# Altium PCB CC2640R2F_Bluetooth_Beacon.PcbDoc
Units mm, origin at the board's own origin, x right, y up, seen from the top; angles counter-clockwise.
Board outline 50 x 60 mm, 2 copper layers (Top Layer, Bottom Layer), stack 0.67 mm thick; 33 components, 52 nets, 149 pads, 148 vias.
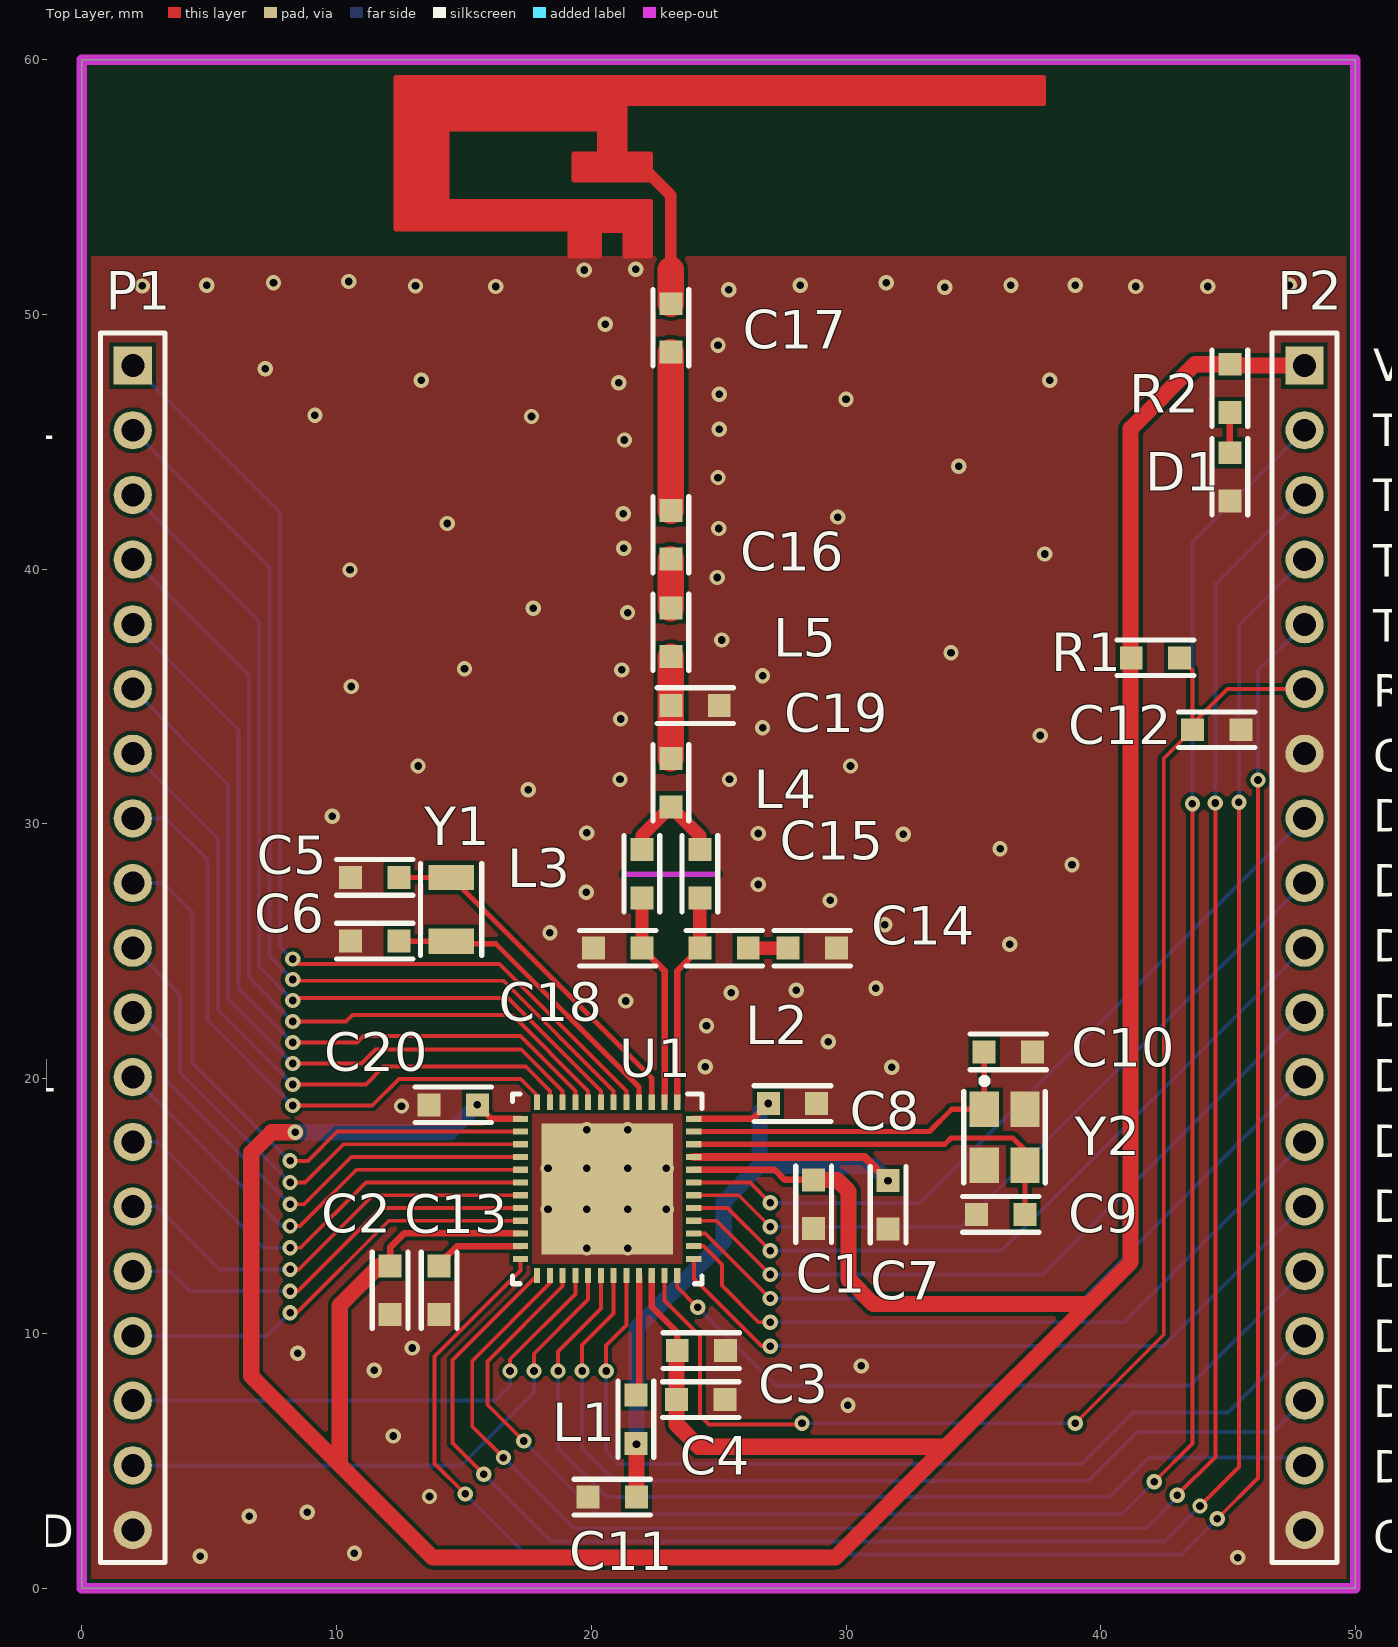
[diagram p0: Top Layer view]
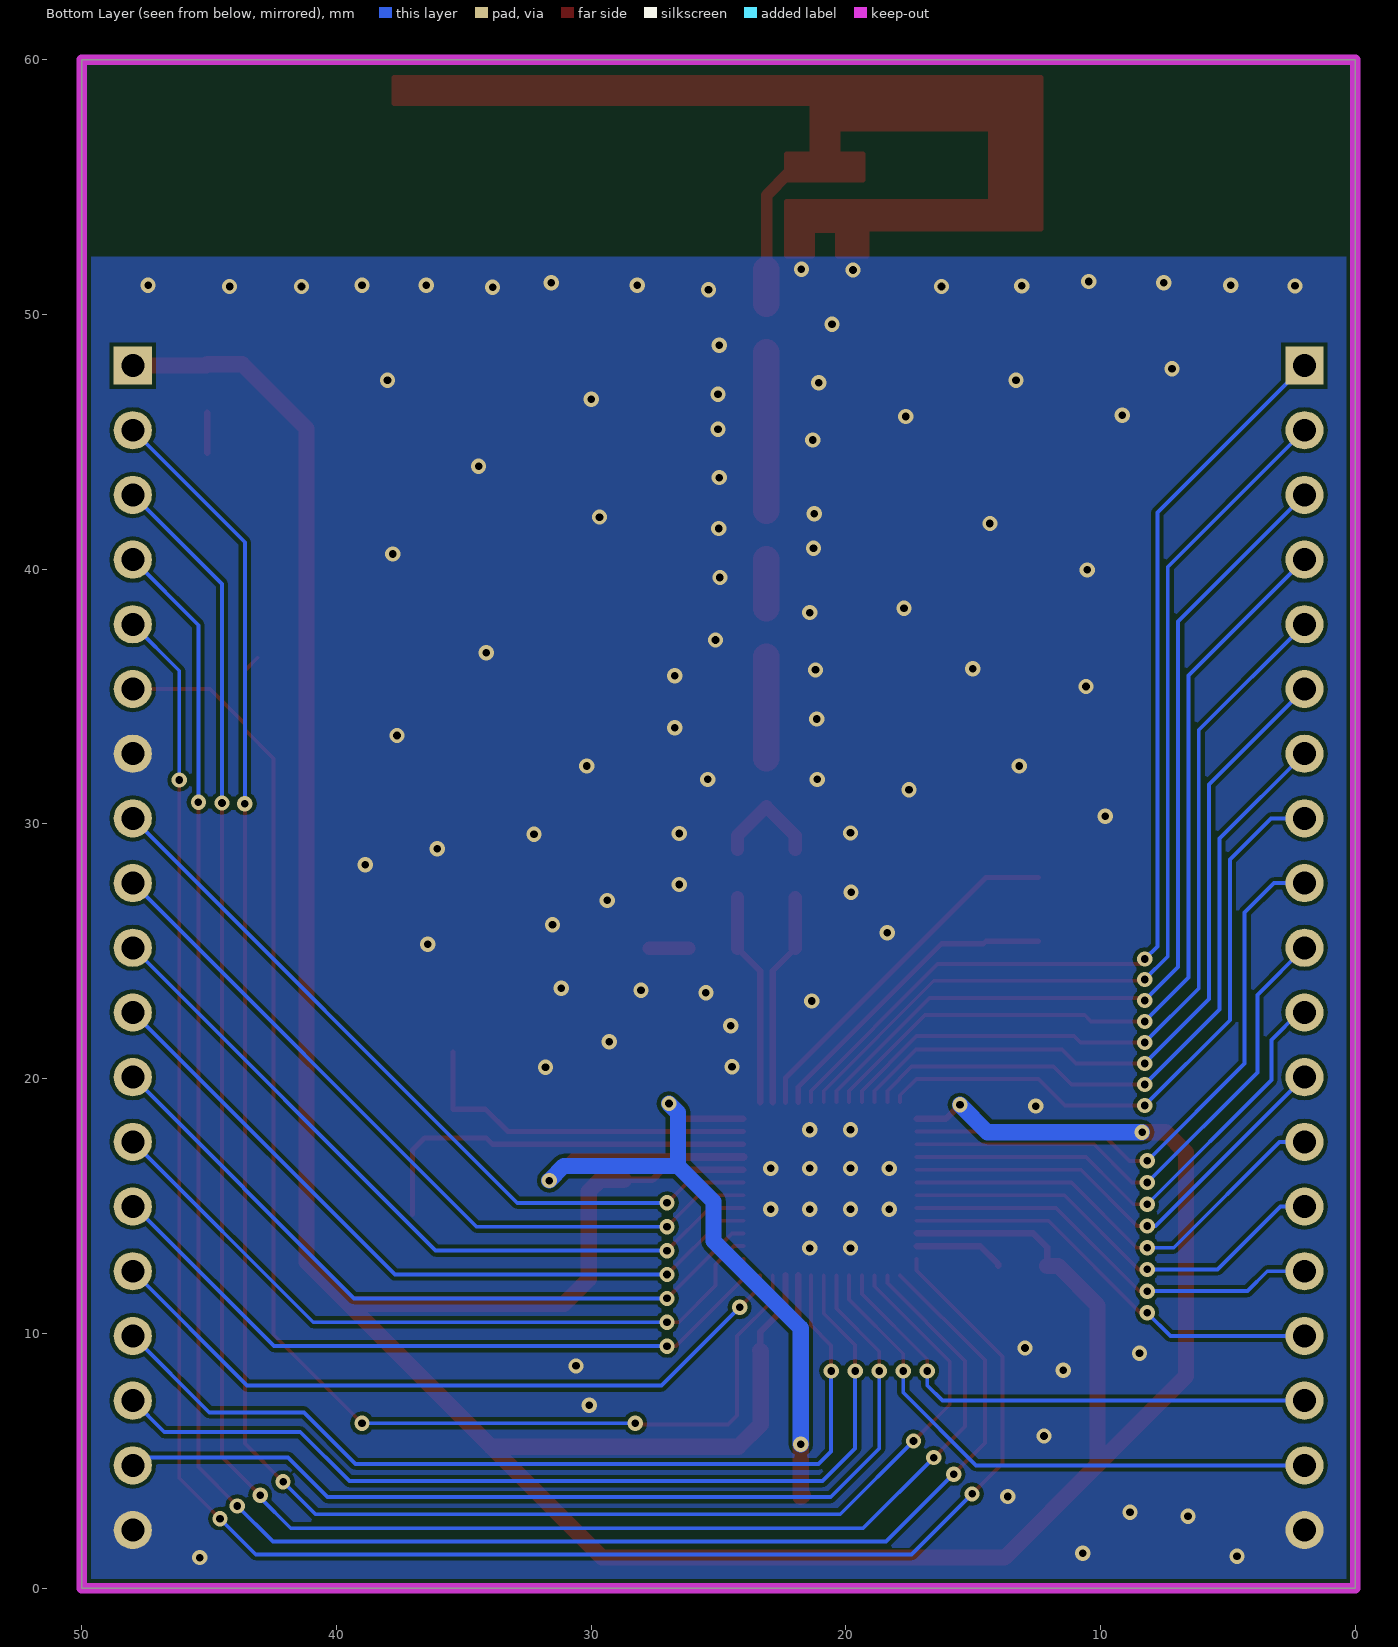
[diagram p1: Bottom Layer view, seen from below]

## Layer stack, top to bottom
Top Solder: solder mask 0.01, Solder Resist, Dk 3.5
Top Layer: signal copper 0.035
Dielectric 1: core 0.6, FR-4, Dk 4.2
Bottom Layer: signal copper 0.035
Bottom Solder: solder mask 0.01, Solder Resist, Dk 3.5

## Board outline
0,0 0,60 50,60 50,0

## Design rules (kind name [scope] priority, off if disabled: settings)
Clearance [All] p1: gap=0.152 ignorepadtopadclearanceinfootprint=FALSE
HoleSize [All] p1: absolutevalues=TRUE maxlimit=2.54 minlimit=0.3 maxpercent=80.000 minpercent=20.000
MaxMinImpedance [InNet('ANT')] p1: minimum=50,00 maximum=50,00
PlaneConnect [All] p1: planeconnectstyle=Direct reliefexpansion=0.508 reliefentries=4 reliefconductorwidth=0.254 reliefairgap=0.254
PolygonConnect [All] p1: connectstyle=Direct reliefconductorwidth=0.254 reliefentries=4 polygonreliefangle="90 Angle" airgapwidth=0.254
RoomDefinition CC2640R2F_Bluetooth_Beacon [InComponentClass('CC2640R2F_Bluetooth_Beacon')] p1: confinementstyle=ConfineIn formatcopy=TRUE lockcomponents=FALSE outline -81.255,-62.513 -30.455,-62.513 -30.455,-37.113 -81.255,-37.113
RoutingVias [All] p1: holewidth=0.3 width=0.6 viastyle="Through Hole" minholewidth=0.3 minwidth=0.6 maxholewidth=0.711 maxwidth=1.27
SolderMaskExpansion [All] p1: expansion=0.102
UnRoutedNet [All] p1: checkbadconnections=TRUE
Width [All] p1: maxlimit=1.27 minlimit=0.152 preferedwidth=0.203
27 further rules are at their usual default settings.

## Components (designator, comment, footprint, x,y, rotation, side; value= is the part's Value field where it differs from the comment)
C1 "Cap" 0603 28.725,15.075 r90 top value=100nF
C2 "Cap" 0603 12.1,11.7 r90 top value=100nF
C3 "Cap" 0603 24.325,9.325 r180 top value=100nF
C4 "Cap" 0603 24.3,7.4 r180 top value=10uF
C5 "Cap" 0603 11.5,27.9 r0 top value=12pF
C6 "Cap" 0603 11.5,25.4 r0 top value=12pF
C7 "Cap" 0603 31.65,15.05 r90 top value=100nF
C8 "Cap" 0603 27.9,19.025 r180 top value=100nF
C9 "DNA" 0603 36.075,14.675 r0 top value=12pF
C10 "DNA" 0603 36.375,21.05 r180 top value=12pF
C11 "Cap" 0603 20.825,3.575 r0 top value=10uF
C12 "Cap" 0603 44.55,33.7 r180 top value=100nF
C13 "Cap" 0603 14.025,11.7 r90 top value=1uF
C14 "Cap" 0603 28.675,25.125 r180 top value=6.8pF
C15 "Cap" 0603 24.263,28.05 r270 top value=1pF
C16 "Cap" 0603 23.125,41.35 r270 top value=12pF
C17 "Cap" 0603 23.125,49.475 r270 top value=1.8pF
C18 "Cap" 0603 21.038,25.125 r0 top value=1pF
C19 "Cap" 0603 24.075,34.65 r180 top value=1pF
C20 "Cap" 0603 14.575,18.975 r0 top value=100nF
D1 "LED" 0603 45.075,43.625 r270 top
L1 "DNA" 0603 21.75,6.625 r90 top value=10uH
L2 "Inductor" 0603 25.213,25.125 r0 top value=2.4nH
L3 "Inductor" 0603 21.988,28.05 r270 top value=2.4nH
L4 "Inductor" 0603 23.125,31.625 r270 top value=2nH
L5 "Inductor" 0603 23.125,37.525 r270 top value=2nH
P1 "Header 19x1" HDR1X19 2,48 r270 top
P2 "Header 19x1" HDR1X19 48,48 r270 top
R1 "Res" 0603 42.15,36.525 r180 top value=100K
R2 "Res" 0603 45.075,47.1 r90 top value=220R
U1 "CC2610R2FFRGZR" VQFN-48 20.625,15.675 r270 top
Y1 "XTAL" FC-135 14.5,26.65 r270 top
Y2 "XTAL-2" TX-3225 36.225,17.7 r270 top

## Footprints (in the part's own frame and the unit in brackets; to place one, negate y for a bottom-side part, rotate by r counter-clockwise, add the part's x,y. Pads: shape width x height; smd on the part's side, far side on the other; paste and mask are expansions set on the pad)
0603 [mm]
  rect 0.9x0.9 smd: 1(-0.95,0) 2(0.95,0)
  silkscreen extent -1.5,-0.7 1.5,0.7, body extent -0.8,-0.4 0.8,0.4, height 0.45
FC-135 [mm]
  rect 1x1.8 smd: 1(-1.25,0) 2(1.25,0)
  silkscreen extent -1.8,-1.2 1.8,1.2, body extent -1.6,-0.75 1.6,0.75, height 0.8
HDR1X19 [mm] "Connector; Header; 19 Position"
  rect 1.5x1.5 hole 0.9: 1(0,0)
  round 1.5 hole 0.9: 2(2.54,0) 3(5.08,0) 4(7.62,0) 5(10.16,0) 6(12.7,0) 7(15.24,0) 8(17.78,0) 9(20.32,0) 10(22.86,0) 11(25.4,0) 12(27.94,0) 13(30.48,0) 14(33.02,0) 15(35.56,0) 16(38.1,0) 17(40.64,0) 18(43.18,0) 19(45.72,0)
  silkscreen extent -1.27,-1.27 46.99,1.27
TX-3225 [mm]
  rect 1.4x1.15 smd: 1(-1.1,-0.8) 2(1.1,-0.8) 3(1.1,0.8) 4(-1.1,0.8)
  silkscreen extent -2.32,-1.6 1.8,1.6, body extent -1.6,-1.25 1.6,1.25, height 0.6
VQFN-48 [mm]
  rect 0.6x0.24 smd paste+0 mask+0.051: 1(-3.4,2.75) 2(-3.4,2.25) 3(-3.4,1.75) 4(-3.4,1.25) 5(-3.4,0.75) 6(-3.4,0.25) 7(-3.4,-0.25) 8(-3.4,-0.75) 9(-3.4,-1.25) 10(-3.4,-1.75) 11(-3.4,-2.25) 12(-3.4,-2.75) 25(3.4,-2.75) 26(3.4,-2.25) 27(3.4,-1.75) 28(3.4,-1.25) 29(3.4,-0.75) 30(3.4,-0.25) 31(3.4,0.25) 32(3.4,0.75) 33(3.4,1.25) 34(3.4,1.75) 35(3.4,2.25) 36(3.4,2.75)
  rect 0.24x0.6 smd paste+0 mask+0.051: 13(-2.75,-3.4) 14(-2.25,-3.4) 15(-1.75,-3.4) 16(-1.25,-3.4) 17(-0.75,-3.4) 18(-0.25,-3.4) 19(0.25,-3.4) 20(0.75,-3.4) 21(1.25,-3.4) 22(1.75,-3.4) 23(2.25,-3.4) 24(2.75,-3.4) 37(2.75,3.4) 38(2.25,3.4) 39(1.75,3.4) 40(1.25,3.4) 41(0.75,3.4) 42(0.25,3.4) 43(-0.25,3.4) 44(-0.75,3.4) 45(-1.25,3.4) 46(-1.75,3.4) 47(-2.25,3.4) 48(-2.75,3.4)
  rect 5.15x5.15 smd paste-2.562 mask+0.051: 49(0,0)
  silkscreen extent -3.72,-3.72 3.72,3.72, body extent -3.51,-3.5 3.49,3.5, height 1

## Part data
C1 C2 C3 C7 C8 C12 C20: "Capacitor", MPN=VJ0603Y104JXQPW1BC
C4 C11: "Capacitor", MPN=GRM188C80G106KE47J
C5 C6 C16: "Capacitor", MPN=VJ0603A120KXQPW1BC
C9 C10: library part Cap, "Capacitor", MPN=VJ0603A120KXQPW1BC
C13: "Capacitor", MPN=CGA3E1X7R1C105K080AC
C14: "Capacitor", MPN=885012006031
C15 C18 C19: "Capacitor", MPN=885012006045
C17: "Capacitor", MPN=VJ0603A1R8BXXCW1BC
D1: "Typical RED GaAs LED", MPN=150060VS55040
L1: library part Inductor, "Inductor", MPN=MLZ1608E100MT
L2 L3: MPN=LQW18AN2N4C80D
L4 L5: MPN=LQG15HZ2N0S02D
P1 P2: "Header, 19-Pin", LatestRevisionDate=17-Jul-2002, LatestRevisionNote="Re-released for DXP Platform.", Publisher="Altium Limited"
R1: "Resistor", MPN=RC0603JR-07100KL
R2: "Resistor", MPN=RC0603JR-13220RL
U1: library part CC2640R2FRGZR, "CC2640R2F SimpleLink™ Bluetooth® low energy Wireless MCU", MPN=CC2640R2FRGZR
Y1: "Crystal Oscillator", MPN="FC-135 32.7680KA-AG0"
Y2: "Crystal Oscillator", Manufacturer PartNo 1="TSX-3225 24.0000MF15X-AC3"

## Via types
v1: diameter 0.6, hole 0.3, Top Layer to Bottom Layer, 148 vias

## Nets (pads, with @x,y where several pads share a name; then routed paths per layer and width w, separated by ;. In a path a pad name is that pad's centre, name@x,y a point inside that pad or via, vN(x,y) a via of type N, cw(c..) or ccw(c..) an arc to the next point about the centre after c; other vN are vias at no path point)
ANT: C17.1 | length 1.3
  Top Layer w1.041: C17.1 23.125,51.768
DCDC_SW: L1.2 U1.33 | length 4.9
  Top Layer w0.254: L1.2@21.7,7.4 21.875,7.575 U1.33
DIO_0: P1.1 U1.5 | length 41.6
  Top Layer w0.152: v1(8.275,24.698) 8.475,24.498 16.402,24.498 21.375,19.525 U1.5
  Bottom Layer w0.152: P1.1 7.775,42.225 7.775,25.198 v1(8.275,24.698)
DIO_1: P1.2 U1.6 | length 39
  Top Layer w0.152: v1(8.275,23.896) 8.325,23.846 16.554,23.846 20.875,19.525 U1.6
  Bottom Layer w0.152: P1.2 7.369,40.091 7.369,24.802 v1(8.275,23.896)
DIO_2: P1.3 U1.7 | length 36.5
  Top Layer w0.152: v1(8.275,23.071) 8.375,23.171 16.729,23.171 20.375,19.525 U1.7
  Bottom Layer w0.152: P1.3 6.962,37.958 6.962,24.384 v1(8.275,23.071)
DIO_3: P1.4 U1.8 | length 34.1
  Top Layer w0.152: v1(8.275,22.247) 10.375,22.247 10.625,22.497 16.903,22.497 19.875,19.525 U1.8
  Bottom Layer w0.152: P1.4 6.556,35.824 6.556,23.966 v1(8.275,22.247)
DIO_4: P1.5 U1.9 | length 31.6
  Top Layer w0.152: v1(8.275,21.423) 10.8,21.423 11.052,21.675 17.225,21.675 19.375,19.525 U1.9
  Bottom Layer w0.152: P1.5 6.149,33.691 6.149,23.548 v1(8.275,21.423)
DIO_5: P1.6 U1.10 | length 29.3
  Top Layer w0.152: v1(8.275,20.599) 10.974,20.599 11.524,21.149 17.251,21.149 18.875,19.525 U1.10
  Bottom Layer w0.152: P1.6 5.743,31.557 5.743,23.131 v1(8.275,20.599)
DIO_6: P1.7 U1.11 | length 26.8
  Top Layer w0.152: v1(8.275,19.774) 11.149,19.774 11.849,20.474 17.426,20.474 18.375,19.525 U1.11
  Bottom Layer w0.152: P1.7 5.337,29.423 5.337,22.713 v1(8.275,19.774)
DIO_7: P1.8 U1.12 | length 25.2
  Top Layer w0.152: v1(8.275,18.95) 11.4,18.95 12.446,19.996 17.229,19.996 17.875,19.35 U1.12
  Bottom Layer w0.152: P1.8 3.31,30.22 4.93,28.6 4.93,22.295 v1(8.275,18.95)
DIO_8: P1.9 U1.14 | length 23.7
  Top Layer w0.152: v1(8.175,16.775) 8.875,16.775 10.025,17.925 U1.14
  Bottom Layer w0.152: P1.9 3.195,27.68 4.35,26.525 4.35,20.6 v1(8.175,16.775)
DIO_9: P1.10 U1.15 | length 21.4
  Top Layer w0.152: v1(8.175,15.923) 8.768,15.923 10.27,17.425 U1.15
  Bottom Layer w0.152: P1.10 3.85,23.29 3.85,20.248 v1(8.175,15.923)
DIO_10: P1.11 U1.16 | length 20
  Top Layer w0.152: v1(8.175,15.07) 8.723,15.07 9.35,15.698 9.35,15.7 10.575,16.925 U1.16
  Bottom Layer w0.152: P1.11 2.225,22.6 3.3,21.525 3.3,19.945 v1(8.175,15.07)
DIO_11: P1.12 U1.17 | length 18.6
  Top Layer w0.152: v1(8.175,14.218) 8.568,14.218 10.775,16.425 U1.17
  Bottom Layer w0.152: P1.12 7.842,14.218 v1(8.175,14.218)
DIO_12: P1.13 U1.18 | length 18
  Top Layer w0.152: v1(8.175,13.365) 8.59,13.365 11.15,15.925 U1.18
  Bottom Layer w0.152: P1.13 2.98,17.52 7.135,13.365 v1(8.175,13.365)
DIO_13: P1.14 U1.19 | length 17.5
  Top Layer w0.152: v1(8.175,12.513) 8.513,12.513 11.425,15.425 U1.19
  Bottom Layer w0.152: P1.14 2.945,14.98 5.412,12.513 v1(8.175,12.513)
DIO_14: P1.15 U1.20 | length 16.9
  Top Layer w0.152: v1(8.175,11.661) 8.486,11.661 11.75,14.925 U1.20
  Bottom Layer w0.152: P1.15 3.46,12.44 4.239,11.661 v1(8.175,11.661)
DIO_15: P1.16 U1.21 | length 17.1
  Top Layer w0.152: v1(8.175,10.808) 8.433,10.808 12.05,14.425 U1.21
  Bottom Layer w0.152: P1.16 7.267,9.9 v1(8.175,10.808)
DIO_16/JTAG_TDO: P2.3 U1.26 | length 78.5
  Top Layer w0.152: v1(16.55,5.125) 15.325,6.35 15.325,8.925 18.375,11.975 U1.26 ; v1(43,3.65) 44.5,5.15 v1(44.5,30.825)
  Bottom Layer w0.152: v1(16.55,5.125) 19.325,2.35 41.798,2.35 43,3.552 v1(43,3.65) ; v1(44.5,30.825) 44.5,39.42 P2.3
DIO_17/JTAG_TDI: P2.2 U1.27 | length 78.5
  Top Layer w0.152: v1(17.35,5.775) 15.925,7.2 15.925,8.9 18.875,11.85 U1.27 ; v1(42.1,4.175) 43.6,5.675 v1(43.6,30.8)
  Bottom Layer w0.152: v1(17.35,5.775) 20.225,2.9 40.825,2.9 v1(42.1,4.175) ; v1(43.6,30.8) 43.6,41.06 P2.2
DIO_18: P1.17 U1.28 | length 20.4
  Top Layer w0.152: v1(16.811,8.525) 16.811,8.986 19.375,11.55 U1.28
  Bottom Layer w0.152: P1.17 16.21,7.36 16.811,7.961 v1(16.811,8.525)
DIO_19: P1.18 U1.29 | length 22.4
  Top Layer w0.152: v1(17.754,8.525) 17.754,9.204 19.875,11.325 U1.29
  Bottom Layer w0.152: P1.18 14.895,4.82 17.754,7.679 v1(17.754,8.525)
DIO_20: P2.18 U1.30 | length 38.4
  Top Layer w0.152: v1(18.696,8.525) 18.696,9.296 20.375,10.975 U1.30
  Bottom Layer w0.152: v1(18.696,8.525) 18.696,5.479 20.6,3.575 40.35,3.575 41.9,5.125 47.695,5.125 P2.18
DIO_21: P2.17 U1.31 | length 37.5
  Top Layer w0.152: v1(19.639,8.525) 19.639,9.539 20.875,10.775 U1.31
  Bottom Layer w0.152: v1(19.639,8.525) 19.639,5.486 20.925,4.2 39.5,4.2 41.425,6.125 46.765,6.125 P2.17
DIO_22: P2.16 U1.32 | length 36.9
  Top Layer w0.152: v1(20.582,8.525) 20.582,9.532 21.375,10.325 U1.32
  Bottom Layer w0.152: v1(20.582,8.525) 20.582,5.368 21.075,4.875 39.25,4.875 41.275,6.9 45,6.9 P2.16
DIO_23: P2.15 U1.36 | length 28.5
  Top Layer w0.152: U1.36 23.375,11.825 v1(24.175,11.025)
  Bottom Layer w0.152: v1(24.175,11.025) 27.25,7.95 43.51,7.95 P2.15
DIO_24: P2.14 U1.37 | length 28.1
  Top Layer w0.152: U1.37 24.025,12.15 26.675,9.5 v1(27.025,9.5)
  Bottom Layer w0.152: v1(27.025,9.5) 42.455,9.5 47.935,14.98 P2.14
DIO_25: P2.13 U1.38 | length 28.6
  Top Layer w0.152: U1.38 24.4,13.425 25.125,12.7 25.125,11.875 26.563,10.437 v1(27.025,10.437)
  Bottom Layer w0.152: v1(27.025,10.437) 40.917,10.437 P2.13
DIO_26: P2.12 U1.39 | length 28.6
  Top Layer w0.152: U1.39 24.475,13.925 v1(27.025,11.375)
  Bottom Layer w0.152: v1(27.025,11.375) 39.315,11.375 P2.12
DIO_27: P2.11 U1.40 | length 29.1
  Top Layer w0.152: U1.40 24.912,14.425 v1(27.025,12.312)
  Bottom Layer w0.152: v1(27.025,12.312) 37.712,12.312 P2.11
DIO_28: P2.10 U1.41 | length 29.6
  Top Layer w0.152: U1.41 25.35,14.925 v1(27.025,13.25)
  Bottom Layer w0.152: v1(27.025,13.25) 36.11,13.25 P2.10
DIO_29: P2.9 U1.42 | length 30.1
  Top Layer w0.152: U1.42 25.787,15.425 v1(27.025,14.188)
  Bottom Layer w0.152: v1(27.025,14.188) 34.508,14.188 P2.9
DIO_30: P2.8 U1.43 | length 30.6
  Top Layer w0.152: U1.43 26.225,15.925 v1(27.025,15.125)
  Bottom Layer w0.152: v1(27.025,15.125) 32.905,15.125 P2.8
GND: C1.1 C2.1 C3.1 C4.1 C5.1 C6.1 C7.1 C8.1 C9.1 C10.1 C11.1 C12.1 C13.1 C14.1 C18.1 C19.1 C20.1 D1.2 P1.19 P2.7 P2.19 U1.49 Y2.2 Y2.4 | length 9.5
  Top Layer w0.203: 19.177,52.396 20.327,52.396 ; 19.177,53.336 19.177,52.295 20.327,52.295 20.327,53.295 ; 21.327,52.396 22.327,52.396 ; 21.327,53.295 21.327,52.295 22.327,52.295 22.327,54.428
  other v1: 45.375,1.2 4.65,1.25 10.7,1.375 6.575,2.825 8.85,2.975 13.65,3.6 12.225,5.975 30.075,7.175 11.475,8.55 30.6,8.725 8.475,9.225 12.975,9.425 19.821,13.35 21.429,13.35 18.3,14.871 19.821,14.871 21.429,14.871 22.95,14.871 18.3,16.479 19.821,16.479 21.429,16.479 22.95,16.479 19.821,18 21.429,18 12.55,18.925 31.8,20.45 24.475,20.475 29.3,21.45 24.525,22.075 21.35,23.05 25.5,23.375 28.05,23.475 31.175,23.55 36.425,25.275 18.375,25.725 31.525,26.05 29.375,27 19.8,27.325 26.55,27.625 38.875,28.4 36.05,29.025 26.55,29.625 32.25,29.6 19.825,29.65 9.825,30.3 17.525,31.35 21.125,31.75 25.425,31.75 13.2,32.275 30.175,32.275 37.625,33.475 26.725,33.775 21.15,34.125 10.575,35.4 26.725,35.825 21.2,36.05 15.025,36.1 34.125,36.725 25.125,37.225 21.425,38.3 17.725,38.475 24.95,39.675 10.525,39.975 37.8,40.6 21.275,40.825 25,41.6 14.35,41.8 29.675,42.05 21.25,42.175 24.975,43.6 34.425,44.05 21.3,45.075 25.025,45.5 17.65,46 9.15,46.05 30,46.675 25.025,46.875 21.075,47.325 13.325,47.425 38,47.425 7.2,47.875 24.975,48.8 20.55,49.625 25.4,50.975 33.875,51.075 16.25,51.1 41.375,51.1 44.2,51.1 2.375,51.125 13.1,51.125 4.9,51.15 28.2,51.15 36.475,51.15 39,51.15 47.4,51.15 7.525,51.25 31.575,51.25 10.475,51.3 19.725,51.75 21.75,51.775
JTAG_TCKC: P2.4 U1.25 | length 78.3
  Top Layer w0.152: v1(15.775,4.475) 14.55,5.7 14.55,8.95 U1.25 ; v1(43.9,3.225) 45.425,4.75 v1(45.425,30.85)
  Bottom Layer w0.152: v1(15.775,4.475) 18.425,1.825 42.5,1.825 v1(43.9,3.225) ; v1(45.425,30.85) 45.425,37.805 P2.4
JTAG_TMSC: P2.5 U1.24 | length 78.7
  Top Layer w0.152: v1(15.05,3.7) 13.85,4.9 13.85,9.1 17.225,12.475 U1.24 ; v1(44.575,2.725) 46.175,4.325 v1(46.175,31.725)
  Bottom Layer w0.152: v1(15.05,3.7) 17.425,1.325 43.175,1.325 v1(44.575,2.725) ; v1(46.175,31.725) 46.175,36.015 P2.5
NetC13_2: C13.2 U1.23 | length 3.6
  Top Layer w0.254: C13.2 14.025,12.725 14.725,13.425 U1.23
NetC14_2: C14.2 L2.2 | length 1.6
  Top Layer w0.521: L2.2 C14.2
NetC15_1: C15.1 L3.1 L4.2 | length 4.3
  Top Layer w0.521: L3.1 21.988,29.538 L4.2 24.263,29.537 C15.1
NetC16_1: C16.1 C17.2 | length 6.2
  Top Layer w1.041: C16.1 C17.2
NetC16_2: C16.2 L5.1 | length 1.9
  Top Layer w1.041: L5.1 C16.2
NetC19_2: C19.2 L4.1 L5.2 | length 4
  Top Layer w1.041: L4.1 C19.2 L5.2
NetD1_1: D1.1 R2.1 | length 1.6
  Top Layer w0.254: D1.1 R2.1
RESET: C12.2 P2.6 R1.1 U1.35 | length 58.1
  Top Layer w0.152: U1.35 22.875,11.3 24.275,9.9 24.275,6.775 24.625,6.425 28.225,6.425 v1(28.275,6.475) ; v1(39,6.475) 42.475,9.95 42.475,32.575 C12.2 C12.2@43.6,33.925 ; R1.1 43.6,36.025 C12.2@43.6,33.925 ; P2.6 44.975,35.3 C12.2@43.6,33.925
  Bottom Layer w0.152: v1(28.275,6.475) v1(39,6.475)
RF_N: C18.2 L3.2 U1.2 | length 8.4
  Top Layer w0.254: C18.2 22.875,24.238 U1.2
  Top Layer w0.521: C18.2 L3.2
RF_P: C15.2 L2.1 U1.1 | length 8.4
  Top Layer w0.254: U1.1 23.375,24.237 L2.1
  Top Layer w0.521: L2.1 C15.2
VDDR: C7.2 C8.2 C11.2 L1.1 U1.45 U1.48 | length 34.2
  Top Layer w0.254: U1.48 26.35,18.425 v1(26.95,19.025)
  Top Layer w0.305: U1.45 30.725,16.925 v1(31.65,16)
  Top Layer w0.635: C11.2@21.7,3.65 C11.2 v1(21.775,5.65) L1.1
  Bottom Layer w0.635: v1(21.775,5.65) 21.775,10.2 25.2,13.625 25.2,15.175 26.6,16.575 ; v1(26.95,19.025) 26.6,18.675 26.6,16.575 ; v1(31.65,16) 31.075,16.575 26.6,16.575
VDDS: C1.2 C2.2 C3.2 C4.2 C20.2 P2.1 R1.2 R2.2 U1.13 U1.22 U1.34 U1.44 | length 155.1
  Top Layer w0.254: C2.2 12.1,13.375 12.65,13.925 U1.22 ; v1(15.525,18.975) 16.075,18.425 U1.13 ; U1.34 22.375,11.05 23.375,10.05 C3.2 ; U1.44 27.2,16.425 27.6,16.025 C1.2
  Top Layer w0.635: v1(8.375,17.9) 7.45,17.9 6.65,17.1 6.65,8.325 10.125,4.85 ; C2.2 11.675,12.65 10.125,11.1 10.125,4.85 ; C3.2 23.35,9.3 C4.2 23.35,6.425 24.225,5.55 33.925,5.55 ; C1.2 29.65,16.025 30.1,15.575 30.1,12.125 31.075,11.15 39.525,11.15 ; P2.1 45.125,48 R2.2 43.7,48.05 41.175,45.525 41.175,12.8 39.525,11.15 ; 10.125,4.85 13.775,1.2 29.575,1.2 33.925,5.55 ; 33.925,5.55 39.525,11.15
  Bottom Layer w0.635: v1(8.375,17.9) 14.45,17.9 v1(15.525,18.975)
X24_N: C9.2 U1.46 Y2.3 | length 15.8
  Top Layer w0.203: U1.46 33.875,17.425 34.125,17.675 36.55,17.675 37.025,17.2 Y2.3 C9.2
X24_P: C10.2 U1.47 Y2.1 | length 14
  Top Layer w0.203: U1.47 33.275,17.925 34.15,18.8 Y2.1 C10.2
X32_Q1: C5.2 U1.3 Y1.1 | length 14.1
  Top Layer w0.203: C5.2 Y1.1 22.375,20.025 U1.3
X32_Q2: C6.2 U1.4 Y1.2 | length 12.4
  Top Layer w0.203: C6.2 Y1.2 14.602,25.298 16.252,25.298 21.875,19.675 U1.4
copper on no net: | length 350
  Top Layer w0.203: 12.344,53.412 22.327,53.412 ; 12.344,53.616 22.327,53.616 ; 12.344,53.819 22.327,53.819 ; 12.344,54.022 22.327,54.022 ; 12.344,54.225 22.327,54.225 ; 12.344,54.428 22.327,54.428 14.327,54.428 14.327,57.295 20.327,57.295 20.327,56.295 19.327,56.295 19.327,55.295 22.327,55.295 22.327,56.295 21.327,56.295 21.327,58.295 37.744,58.295 37.744,59.305 12.344,59.305 12.344,53.362 12.878,53.362 19.177,53.336 ; 12.344,54.632 14.327,54.632 ; 12.344,54.835 14.327,54.835 ; 12.344,55.038 14.327,55.038 ; 12.344,55.241 14.327,55.241 ; 12.344,55.444 14.327,55.444 ; 12.344,55.648 14.327,55.648 ; 12.344,55.851 14.327,55.851 ; 12.344,56.054 14.327,56.054 ; 12.344,56.257 14.327,56.257 ; 12.344,56.46 14.327,56.46 ; 12.344,56.664 14.327,56.664 ; 12.344,56.867 14.327,56.867 ; 12.344,57.07 14.327,57.07 ; 12.344,57.273 14.327,57.273 ; 12.344,57.476 21.327,57.476 ; 12.344,57.68 21.327,57.68 ; 12.344,57.883 21.327,57.883 ; 12.344,58.086 21.327,58.086 ; 12.344,58.289 21.327,58.289 ; 12.344,58.492 37.744,58.492 ; 12.344,58.696 37.744,58.696 ; 12.344,58.899 37.744,58.899 ; 12.344,59.102 37.744,59.102 ; 19.177,52.6 20.327,52.6 ; 19.177,52.803 20.327,52.803 ; 19.177,53.006 20.327,53.006 ; 19.177,53.209 20.327,53.209 ; 19.327,55.444 22.327,55.444 ; 19.327,55.648 22.327,55.648 ; 19.327,55.851 22.327,55.851 ; 19.327,56.054 22.327,56.054 ; 19.327,56.257 22.327,56.257 ; 20.327,53.295 21.327,53.295 ; 20.327,56.46 21.327,56.46 ; 20.327,56.664 21.327,56.664 ; 20.327,56.867 21.327,56.867 ; 20.327,57.07 21.327,57.07 ; 20.327,57.273 21.327,57.273 ; 21.327,52.6 22.327,52.6 ; 21.327,52.803 22.327,52.803 ; 21.327,53.006 22.327,53.006 ; 21.327,53.209 22.327,53.209
  Top Layer w0.457: 22.26,55.543 23.114,54.689 23.114,52.168

## Polygon pours and split planes (outlines as drawn)
GND on Bottom Layer "Bottom Layer-GND" (solid, remove dead copper, pour order 2): 0,0 50,0 50,52.275 0,52.275
GND on Top Layer "Top Layer-GND" (solid, remove dead copper, pour order 0): 0,0 50,0 50,52.295 0,52.295

## Keep-outs
Top Layer:
  lines w0.203: 21.341,28.025 24.909,28.025
Keep-Out Layer:
  the board outline again, w0.406

## Silkscreen, mask and mechanical layers (free items; w line width, h text height)
Top Overlay:
  text "DIO_0" at -6.667,47.64 h1.27
  text "VDD" at 50.7,47.38 h1.27
  text "DIO_1" at -6.244,45.115 h1.27
  text "TDI" at 50.7,44.824 h1.27
  text "DIO_2" at -6.667,42.565 h1.27
  text "TDO" at 50.7,42.269 h1.27
  text "DIO_3" at -6.667,39.94 h1.27
  text "TCKC" at 50.7,39.713 h1.27
  text "DIO_4" at -6.667,37.24 h1.27
  text "TMSC" at 50.7,37.158 h1.27
  text "DIO_5" at -6.667,34.69 h1.27
  text "RESET" at 50.7,34.602 h1.27
  text "DIO_6" at -6.667,32.265 h1.27
  text "GND" at 50.7,32.047 h1.27
  text "DIO_30" at 50.7,29.703 h1.27
  text "DIO_7" at -6.667,29.465 h1.27
  text "DIO_29" at 50.7,27.147 h1.27
  text "DIO_8" at -6.667,26.865 h1.27
  text "DIO_28" at 50.7,24.592 h1.27
  text "DIO_9" at -6.667,24.515 h1.27
  text "DIO_27" at 50.7,22.036 h1.27
  text "DIO_10" at -7.725,21.965 h1.27
  text "DIO_11" at -7.302,19.49 h1.27
  text "DIO_26" at 50.7,19.48 h1.27
  text "DIO_12" at -7.725,16.915 h1.27
  text "DIO_25" at 50.7,16.925 h1.27
  text "DIO_13" at -7.725,14.565 h1.27
  text "DIO_24" at 50.7,14.369 h1.27
  text "DIO_23" at 50.7,11.814 h1.27
  text "DIO_14" at -7.725,11.715 h1.27
  text "DIO_22" at 50.7,9.258 h1.27
  text "DIO_15" at -7.725,9.165 h1.27
  text "DIO_18" at -7.725,6.74 h1.27
  text "DIO_21" at 50.7,6.703 h1.27
  text "DIO_20" at 50.7,4.147 h1.27
  text "DIO_19" at -7.725,4.115 h1.27
  text "GND" at -4.339,1.615 h1.27
  text "GND" at 50.7,1.38 h1.27
Mechanical 13:
  the board outline again, w0.203